# Altium PCB BrushedESC.PcbDoc
Units mil, origin at the board's own origin, x right, y up, seen from the top; angles counter-clockwise.
Board outline 560 x 560 mil, 2 copper layers (Top Layer, Bottom Layer); 2 components, 6 nets, 18 pads, 7 vias.
Unrouted connection lines stored in the file: 1.
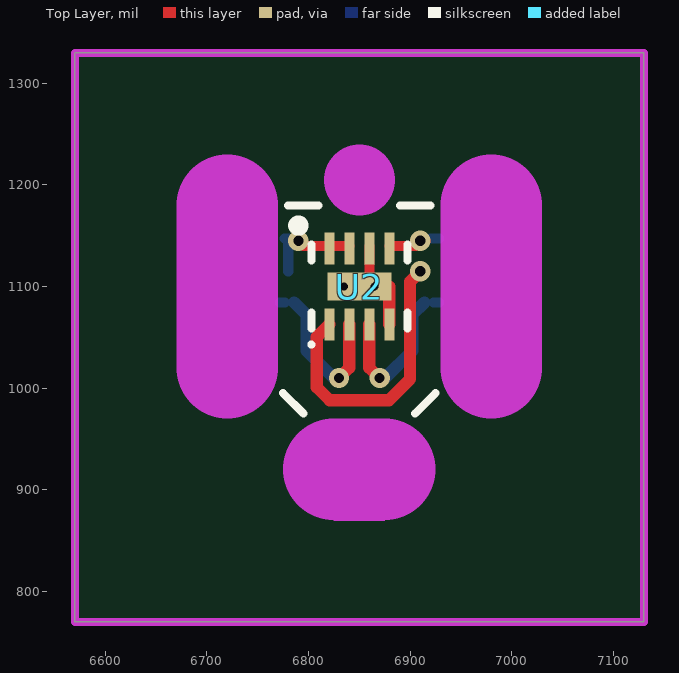
[diagram p0: Top Layer view]
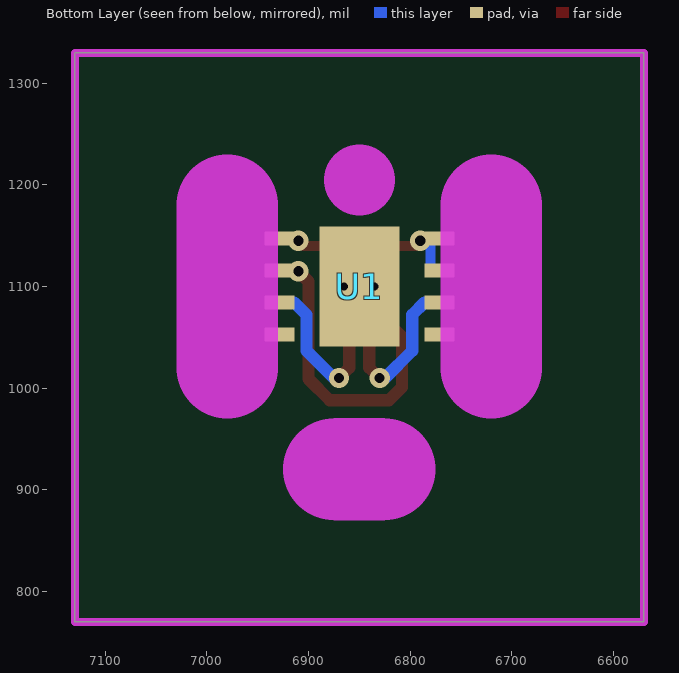
[diagram p1: Bottom Layer view, seen from below]

## Layer stack, top to bottom
Top Solder: solder mask 0.4, Solder Resist, Dk 3.5
Top Layer: signal copper 1.4
Dielectric 1: dielectric 12.6, FR-4, Dk 4.8
Bottom Layer: signal copper 1.4
Bottom Solder: solder mask 0.4, Solder Resist, Dk 3.5

## Board outline
6570,770 6570,1330 7130,1330 7130,770

## Design rules (kind name [scope] priority, off if disabled: settings)
Clearance [All] p1: gap=5.91
PolygonConnect [All] p1: connectstyle=Relief reliefconductorwidth=10 reliefentries=4 polygonreliefangle="90 Angle" airgapwidth=10
RoutingVias [All] p1: holewidth=28 width=50 viastyle="Through Hole" minholewidth=28 minwidth=50 maxholewidth=28 maxwidth=50
SolderMaskExpansion [All] p1: expansion=4
Width [All] p1: maxlimit=15 minlimit=10 preferedwidth=10
30 further rules are at their usual default settings.

## Components (designator, comment, footprint, x,y, rotation, side; value= is the part's Value field where it differs from the comment)
U1 "MCP8063" DFN8 6850,1100 r0 bottom
U2 "DRV8838" SON50P200X80_HS-9N 6850,1100 r90 top

## Footprints (in the part's own frame and the unit in brackets; to place one, negate y for a bottom-side part, rotate by r counter-clockwise, add the part's x,y. Pads: shape width x height; smd on the part's side, far side on the other; paste and mask are expansions set on the pad)
DFN8 [mm] "SON, 8-Leads, Body 4.00x4.00mm, Pitch 0.80mm, Thermal Pad 3.50x2.58mm, IPC Medium Density"
  rect 0.75x0.35 smd: 1(-2,-1.2) 2(-2,-0.4) 3(-2,0.4) 4(-2,1.2) 5(2,1.2) 6(2,0.4) 7(2,-0.4) 8(2,-1.2)
  rect 2x3 smd paste-1.29: 9(0,0)
  body extent -2,-2 2,2, height 0.85
SON50P200X80_HS-9N [mm] "SON, 8-Leads, Body 2.00x2.00mm, Pitch 0.50mm, Thermal Pad 1.60x0.69mm, IPC Medium Density"
  rect 0.8x0.25 smd mask+0.08: 1(-0.945,0.75) 2(-0.945,0.25) 3(-0.945,-0.25) 4(-0.945,-0.75) 5(0.945,-0.75) 6(0.945,-0.25) 7(0.945,0.25) 8(0.945,0.75)
  rect 0.69x1.6 smd paste-0.345 mask+0.08: 9(0,0)
  silkscreen extent -1.5,-1.2 1.05,1.25, body extent -1.05,-1.05 1.05,1.05, height 0.8

## Part data
U1 U2: "3-Phase Brushless DC Sinusoidal Sensorless Fan Motor Driver, MOSFET Output, 2 to 14 V, 8-pin SOP (SE8), Tube"

## Via types
v1: diameter 20, hole 10, Top Layer to Bottom Layer, tented both sides, 5 vias
v2: diameter 19.68, hole 7.87, Top Layer to Bottom Layer, tented both sides, 2 vias

## Nets (pads, with @x,y where several pads share a name; then routed paths per layer and width w, separated by ;. In a path a pad name is that pad's centre, name@x,y a point inside that pad or via, vN(x,y) a via of type N, cw(c..) or ccw(c..) an arc to the next point about the centre after c; other vN are vias at no path point)
GND: U1.5 U1.9 U2.4 U2.6 U2.9 | length 93.8
  Top Layer w10: U2.6@6860,1140 6860,1105 v2(6865,1100)
  Top Layer w12: v2(6865,1100) 6879.53,1100 U2.4
  other v2: 6835,1100
NetU1_3: U1.3 U2.2 | length 158.2
  Top Layer w12: v1(6830,1010) 6840.16,1020.16 U2.2
  Bottom Layer w10: U1.3 U1.3@6776.84,1084.25 ; v1@6826.15,1010 v1(6830,1010)
  Bottom Layer w12: U1.3@6785.84,1084.25 6797.93,1072.17 6797.93,1036.81 6824.74,1010 v1@6826.15,1010
NetU1_6: U1.6 U2.3 | length 158.2
  Top Layer w12: U2.3 6859.84,1020.16 v1(6870,1010)
  Bottom Layer w10: v1(6870,1010) v1@6873.85,1010 ; U1.6@6923.16,1084.25 U1.6
  Bottom Layer w12: v1@6873.85,1010 6875.26,1010 6902.07,1036.81 6902.07,1072.17 U1.6@6914.16,1084.25
PWM: U1.8 U2.5 | length 45.8
  Top Layer w10: U2.5@6880,1140 6905,1140 v1(6910,1145) v1@6915,1145
  Bottom Layer w10: U1.8@6920,1147.24 U1.8
VCC: U1.1 U1.2 U2.7 U2.8 | length 85.8
  Top Layer w10: v1(6790,1145) 6795,1140 U2.7@6840,1140
  Bottom Layer w10: U1.1@6776.26,1147.24 U1.1@6780,1147.24 ; U1.2@6780,1115 U1.1@6780,1145
VDD: U1.7 U2.1 | length 283
  Top Layer w12: U2.1 6808.09,1050.42 6808.09,1000.93 6820.93,988.09 6879.07,988.09 6900,1009.02 6900,1105 v1(6910,1115)
pads on no net: U1.4

## Keep-outs
Keep-Out Layer:
  circle w70: c6850,1205 r0
  lines w1: 6825,870 6875,870 ; 6825,970 6875,970
  lines w7.87: 6570,770 7130,770 7130,1330 6570,1330 6570,770
  lines w100: 6720,1020 6720,1180 ; 6825,920 6875,920 ; 6980,1020 6980,1180

## Silkscreen, mask and mechanical layers (free items; w line width, h text height)
Top Overlay:
  circle w10: c6790,1160 r5
  lines w7.87: 6775,995 6795,975 ; 6780,1180 6810,1180 ; 6890,1180 6920,1180 ; 6905,975 6925,995